# Altium PCB main.PcbDoc
Units mil, origin at the board's own origin, x right, y up, seen from the top; angles counter-clockwise.
Board outline 787.4 x 787.4 mil, 4 copper layers (Top, Ground 1, Signal 1, Bottom), stack 60.591 mil thick; 26 components, 16 nets, 70 pads, 49 vias.
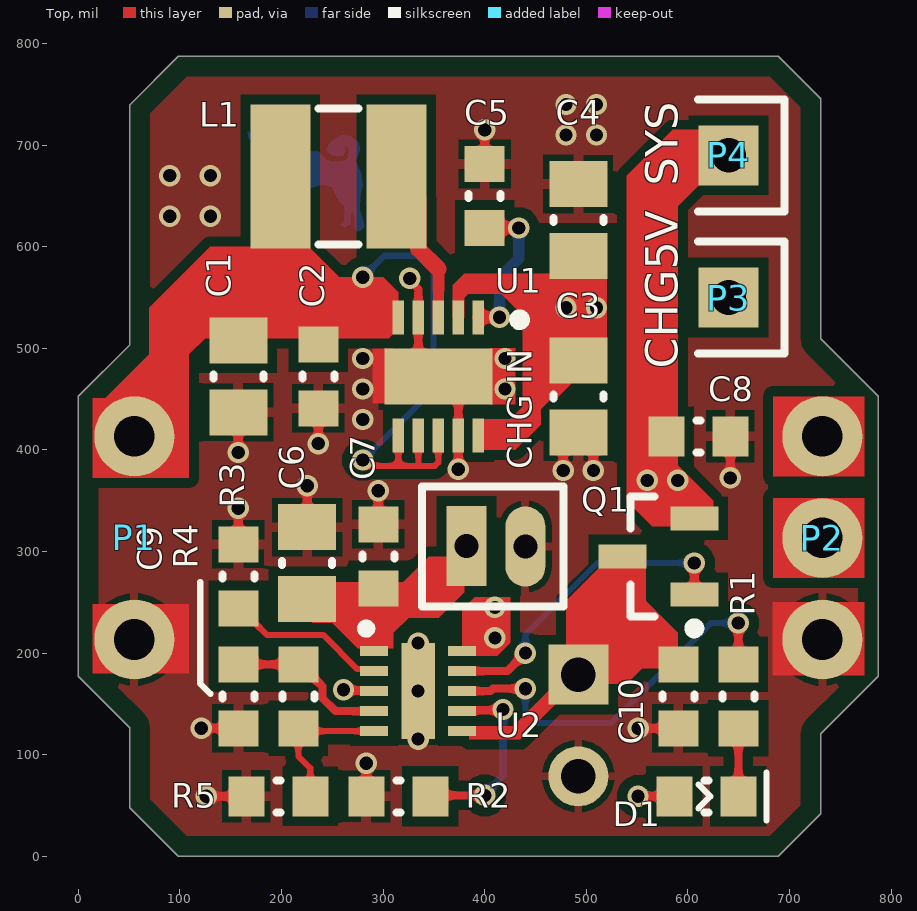
[diagram p0: Top view]
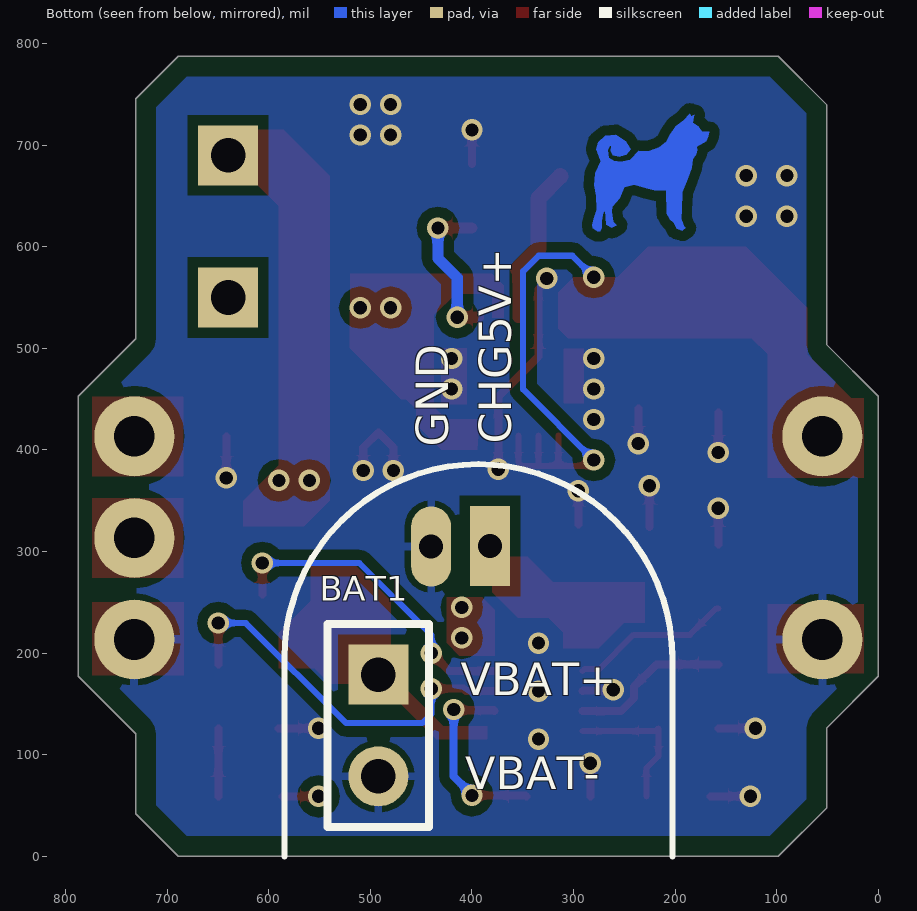
[diagram p1: Bottom view, seen from below]
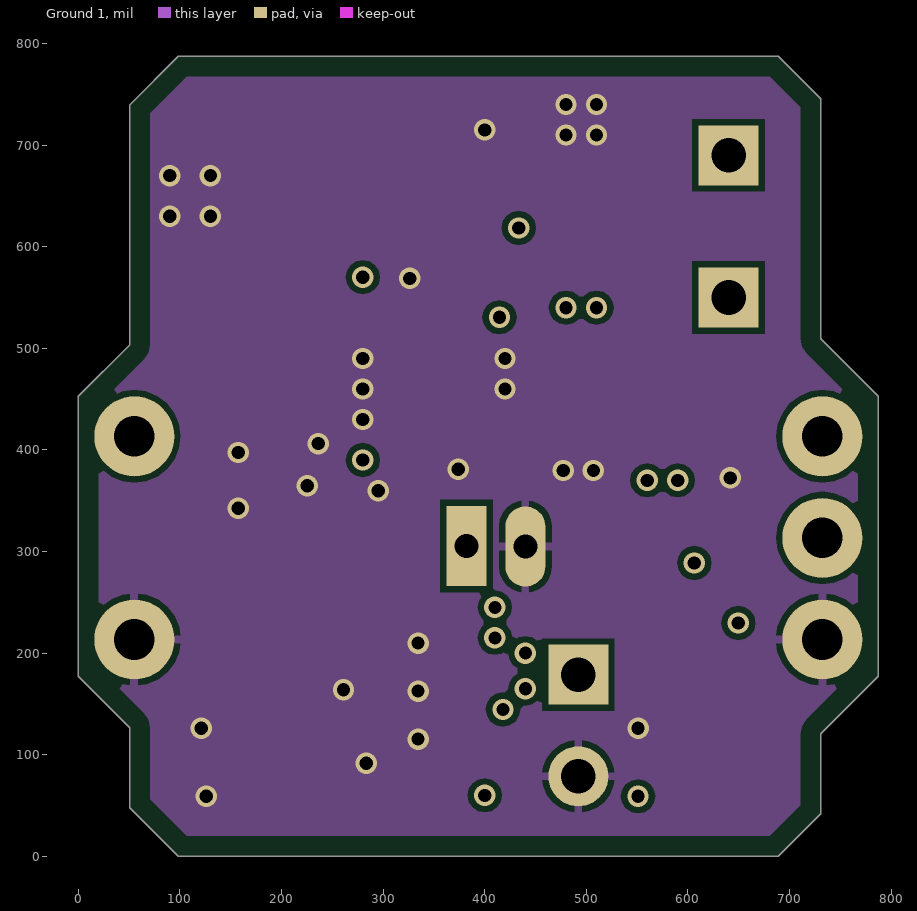
[diagram p2: Ground 1]
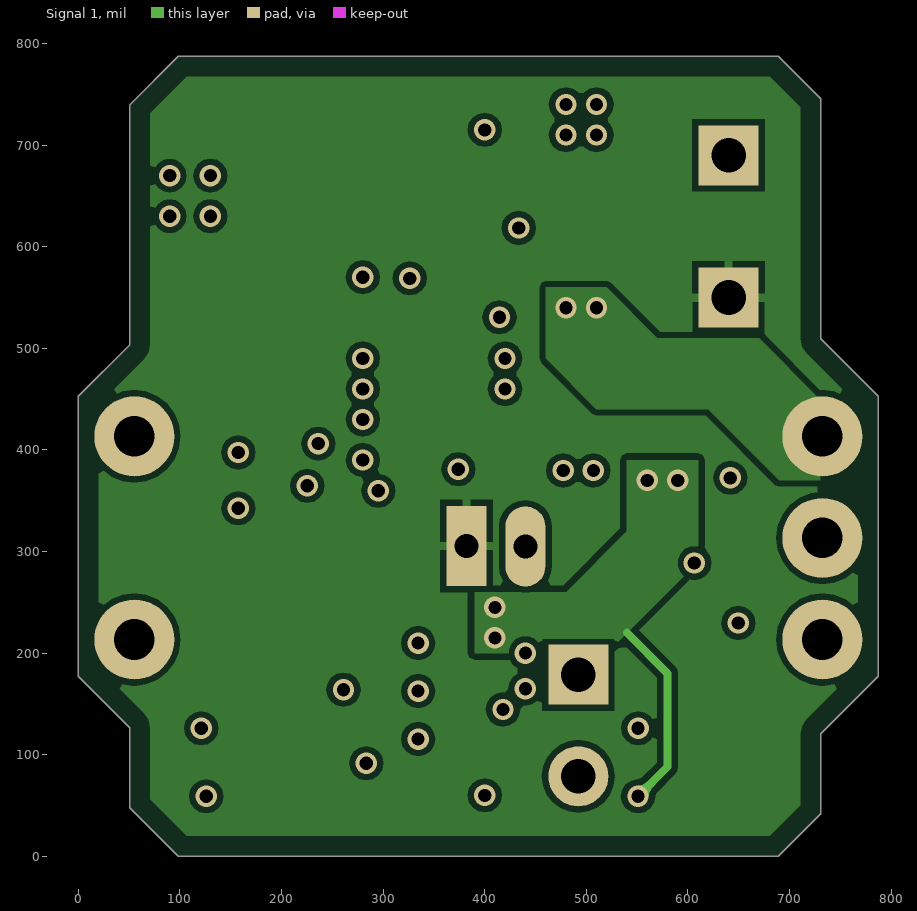
[diagram p3: Signal 1]

## Layer stack, top to bottom
Top Solder: solder mask 0.7874, Solder Resist, Dk 3.5
Top: signal copper 0.7087
Dielectric 1: core 3.937, FR-4, Dk 4.8
Ground 1: signal copper 0.7087
Dielectric 3: prepreg 49.2126, Dk 4.2
Signal 1: signal copper 1.378
Dielectric 5: core 3.937, Dk 4.2
Bottom: signal copper 0.7087
Bottom Solder: solder mask 0.7874, Solder Resist, Dk 3.5

## Board outline
50.64,47.78 50.64,126.52 0,177.17 0,452.76 50.64,503.4 50.64,739.62 98.43,787.4 688.98,787.4 730.79,745.59 730.79,509.37 787.4,452.76 787.4,177.17 730.79,120.55 730.79,41.81 688.98,0 98.43,0

## Design rules (kind name [scope] priority, off if disabled: settings)
BoardOutlineClearance [All] p1: gap=19.68 ignorepadtopadclearanceinfootprint=FALSE
Clearance PolyClearance_Inner [InPolygon And (Not(OnBottom Or OnTop) )] p1: gap=6 ignorepadtopadclearanceinfootprint=FALSE
Clearance PolyClearance_Outer [InPolygon And (OnBottom Or OnTop) and InNet('GND')] p2: gap=10 ignorepadtopadclearanceinfootprint=FALSE
Clearance [All] p3: gap=6 ignorepadtopadclearanceinfootprint=FALSE
ComponentClearance ComponentClearance_1 [HasFootprint('HDR1X5') vs HasFootprint('HDR1X5')] p1: gap=0 collisioncheckmode=3 verticalgap=100000 showdistances=FALSE
ComponentClearance [All] p2: gap=8 collisioncheckmode=3 verticalgap=10 showdistances=FALSE
DiffPairsRouting [All] p1: maxlimit=16 minlimit=5 mostfreqgap=10 toplayer_minwidth=4 toplayer_maxwidth=15 toplayer_prefwidth=10 midlayer1_minwidth=4 midlayer1_maxwidth=15 midlayer1_prefwidth=10 midlayer2_minwidth=4 midlayer2_maxwidth=15 midlayer2_prefwidth=10 bottomlayer_minwidth=4 bottomlayer_maxwidth=15 bottomlayer_prefwidth=10 maxuncoupledlength=500
HoleSize [All] p1: absolutevalues=TRUE maxlimit=200 minlimit=1 maxpercent=80.000 minpercent=20.000
MinimumSolderMaskSliver [All] p1: minsoldermaskwidth=0
MinimumSolderMaskSliver SilkscreenOverComponentPads [All] p2: minsoldermaskwidth=10
PlaneClearance [All] p1: clearance=6
PlaneConnect [All] p1: planeconnectstyle=Relief reliefexpansion=6 reliefentries=4 reliefconductorwidth=6 reliefairgap=6
PolygonConnect PolygonConnect_1 [IsVia vs (OnBottom Or OnTop)] p1: connectstyle=Direct reliefconductorwidth=8 reliefentries=4 polygonreliefangle="90 Angle" airgapwidth=6
PolygonConnect PolygonConnect_Inner [Not (OnTop  Or OnBottom )] p2: connectstyle=Direct reliefconductorwidth=8 reliefentries=4 polygonreliefangle="90 Angle" airgapwidth=2
PolygonConnect PolygonConnect_Outer [(OnTop  Or OnBottom ) and InNet('GND')] p3: connectstyle=Relief reliefconductorwidth=10 reliefentries=4 polygonreliefangle="90 Angle" airgapwidth=6
PolygonConnect [All] p4: connectstyle=Direct reliefconductorwidth=10 reliefentries=4 polygonreliefangle="90 Angle" airgapwidth=10
RoutingVias [All] p1: holewidth=13 width=21 viastyle="Through Hole" minholewidth=4 minwidth=10 maxholewidth=100 maxwidth=300
SilkToSilkClearance [All] p1: silktosilkclearance=6
SilkToSolderMaskClearance [IsPad] p1: minsilkscreentomaskgap=6 clearancetoexposedcopper=TRUE
SolderMaskExpansion SolderMaskExpansion_1 [AsMils(ViaSize) <= 21] p1: expansion=-12 istentingtop=FALSE
SolderMaskExpansion [All] p2: expansion=3 istentingtop=FALSE
Width [All] p1: maxlimit=32 minlimit=3.6 preferedwidth=6 minimp=50.000000 maximp=50.000000 favimp=50.000000
22 further rules are at their usual default settings.

## Components (designator, comment, footprint, x,y, rotation, side; value= is the part's Value field where it differs from the comment)
BAT1 "Header 2" HDR1X2 492.13,178.74 r270 bottom
C1 "10uF" CAPC0805(2012)130_N 157.48,472.44 r270 top
C2 "0.1uF" CAPC0603(1608)100_N 236.22,472.44 r270 top
C3 "10uF" CAPC0805(2012)130_N 492.13,452.76 r270 top
C4 "10uF" CAPC0805(2012)130_N 492.13,626.3 r90 top
C5 "0.1uF" CAPC0603(1608)100_N 400,650 r90 top
C6 "10uF" CAPC0805(2012)130_N 225.32,288.52 r90 top
C7 "0.1uF" CAPC0603(1608)100_N 295.28,295.28 r90 top
C8 "1uF" CAPC0603(1608)100_N 610.24,413.39 r0 top
C9 "0.1uF" CAPC0603(1608)100_N 157.48,157.48 r270 top
C10 "0.1uF" CAPC0603(1608)100_N 590.55,157.48 r270 top
"CHG IN" "MHDR1X2" MHDR1X2 386.35,305.03 r0 top
D1 "RED LED" LED_0603 618.11,59.06 r180 top
L1 "2.2uH NR3015T2R2M" IND_3x3_SMD 255.91,669.29 r0 top
P1 "Header 3" HDR1X3#1 55.12,413.39 r270 top
P2 "Header 3" HDR1X3#2 732.28,213.39 r90 top
P3 "Plug" PIN1 640,550 r0 top
P4 "Plug" PIN1 640,690 r0 top
Q1 "FDN342P" SOT-23 570.87,295.28 r180 top
R1 "1k" RESC0603(1608)_N 649.61,157.48 r90 top
R2 "1k" RESC0603(1608)_N 314.96,59.06 r180 top
R3 "1k" RESC0603(1608)_N 157.48,275.59 r270 top
R4 "27k" RESC0603(1608)_N 216.54,157.48 r90 top
R5 "3.3k" RESC0603(1608)_N 196.85,59.06 r0 top
U1 "TPS61202" DRC10_TI 354.33,472.44 r270 top
U2 "BQ25050DQCR" TI_WSON10 334.45,162.63 r0 top

## Footprints (in the part's own frame and the unit in brackets; to place one, negate y for a bottom-side part, rotate by r counter-clockwise, add the part's x,y. Pads: shape width x height; smd on the part's side, far side on the other; paste and mask are expansions set on the pad)
CAPC0603(1608)100_N [mm] "Chip Capacitor, Body 1.6x0.8mm, Height 1.0mm, IPC Medium Density"
  rect 0.9x1 smd: 1(-0.8,0) 2(0.8,0)
  silkscreen extent -0.05,-0.4 0.05,0.4, body extent -0.87,-0.48 0.88,0.47, height 1
CAPC0805(2012)130_N [mm] "Chip Capacitor, Body 2.0x1.2mm, Height 1.3mm, IPC Medium Density"
  rect 1.15x1.45 smd: 1(-0.9,0) 2(0.9,0)
  silkscreen extent -0.05,-0.62 0.05,0.63, body extent -1.1,-0.72 1.1,0.73, height 1.3
DRC10_TI [mm]
  rect 0.85x0.28 smd paste-0.14: 1(-1.475,1) 2(-1.475,0.5) 3(-1.475,0) 4(-1.475,-0.5) 5(-1.475,-1) 6(1.475,-1) 7(1.475,-0.5) 8(1.475,0) 9(1.475,0.5) 10(1.475,1)
  rect 1.4x2.7 smd paste-0.14: 11(0,0)
  silkscreen extent -1.53,1.92 -1.31,2.14, body extent -1.5,-1.5 1.5,1.5, height 0.7
HDR1X2 [mm] "Connector; Header; 2 Position"
  rect 1.5x1.5 hole 0.864: 1(0,0)
  round 1.5 hole 0.864: 2(2.54,0)
  silkscreen extent -1.27,-1.27 3.81,1.27
HDR1X3#1 [mm] "Connector; Header; 3 Position"
  round 2 hole 1.016: 1(0,0) 3(5.08,0)
HDR1X3#2 [mm] "Connector; Header; 3 Position"
  round 2 hole 1.016: 1(0,0) 2(2.54,0) 3(5.08,0)
IND_3x3_SMD [mm] "Power Inductor SMD 3x3mm"
  rect 1.5x3.6 smd: 1(-1.45,0) 2(1.45,0)
  silkscreen extent -0.5,-1.7 0.5,1.7, body extent -1.5,-1.5 1.5,1.5, height 2
LED_0603 [mm] "LED DIODE 0603"
  rect 0.9x1 smd: 1(-0.8,0) 2(0.8,0)
  silkscreen extent -1.5,-0.6 0.2,0.6, body extent -0.85,-0.47 0.85,0.47, height 0.6
MHDR1X2 [mm] "Connector; Header; 2 Position"
  rect 1x2 hole 0.6: 1(-0.108,0.009)
  oval 1x2 hole 0.6: 2(1.364,-0.002)
  silkscreen extent -1.23,-1.5 2.32,1.5
PIN1 [mm] "Connector; Plug"
  rect 1.5x1.5 hole 0.864: 1(0,0)
  silkscreen extent -0.76,-1.4 1.4,1.4
RESC0603(1608)_N [mm] "Chip Resistor, Body 1.6x0.8mm, IPC Medium Density"
  rect 0.9x1 smd: 1(-0.8,0) 2(0.8,0)
  silkscreen extent -0.05,-0.4 0.05,0.4, body extent -0.85,-0.47 0.85,0.47, height 0.6
SOT-23 [mm]
  rect 1.2x0.6 smd: 1(-0.9,0.95) 2(-0.9,-0.95) 3(0.9,0)
  silkscreen extent -1.02,-1.5 0.7,1.92, body extent -0.7,-1.52 0.7,1.52, height 1.12
TI_WSON10 [mm]
  rect 0.7x0.25 smd paste+0: 1(-1.1,1) 2(-1.1,0.5) 3(-1.1,0) 4(-1.1,-0.5) 5(-1.1,-1) 6(1.1,-1) 7(1.1,-0.5) 8(1.1,0) 9(1.1,0.5) 10(1.1,1)
  rect 0.84x2.4 smd paste-0.1: 11(0,0)
  silkscreen extent -1.4,1.46 -1.2,1.66, body extent -1,-1.5 1,1.5, height 0.7

## Part data
BAT1 "CHG IN": "Header, 2-Pin", LatestRevisionDate=17-Jul-2002, LatestRevisionNote="Re-released for DXP Platform.", Publisher="Altium Limited"
C1 C2 C3 C4 C5 C6 C7 C8 C9 C10: library part CAP, "Capacitor Ceramic"
D1: library part LED, "LED OPTO"
L1: library part IND_PWR, "Power Inductor SMD"
P1 P2: "Header, 3-Pin", LatestRevisionDate=17-Jul-2002, LatestRevisionNote="Re-released for DXP Platform.", Publisher="Altium Limited"
Q1: library part "TRANSISTOR PCH FET", "P CHANNEL FET", Current - Continuous Drain (Id) @ 25° C=115mA, Drain to Source Voltage (Vdss)=60V, Input Capacitance (Ciss) @ Vds="50pF @ 25V", Manufacturer="Fairchild Semiconductor", Manufacturer Part Number=2N7002, Package / Case="SOT-23-3, TO-236-3, Micro3™, SSD3, SST3", Power - Max=200mW, Supplier Part Number=2N7002NTR-ND, Category="Discrete Semiconductor Products", FET Feature="Logic Level Gate", FET Type="MOSFET N-Channel, Metal Oxide", Gate Charge (Qg) @ Vgs=-, Mounting Type="Surface Mount", Packaging="Tape & Reel (TR)", Rds On (Max) @ Id, Vgs="7.5 Ohm @ 500mA, 10V", Reel=Q2, RoHS="RoHS Compliant", Supplier=Digi-Key, Supplier 1=Digi-Key, Supplier Part Number 1=2N7002NTR-ND, Vgs(th) (Max) @ Id="2.5V @ 250µA"
R1 R2 R3 R4 R5: library part RES, "Resistor SMD"
U1: library part TPS61200, "Buck-Boost Regulator"
U2: library part bq25050, "IC BATT CHG LI-ION 1CELL 10WSON"
P3 P4: LatestRevisionDate=17-Jul-2002, LatestRevisionNote="Re-released for DXP Platform.", Publisher="Altium Limited"

## Via types
v1: diameter 21, hole 13, Top to Bottom, tented both sides, 49 vias

## Nets (pads, with @x,y where several pads share a name; then routed paths per layer and width w, separated by ;. In a path a pad name is that pad's centre, name@x,y a point inside that pad or via, vN(x,y) a via of type N, cw(c..) or ccw(c..) an arc to the next point about the centre after c; other vN are vias at no path point)
+5V: "CHG IN.1" C6.1 C7.1 P3.1 U2.1
BAT: BAT1.1 C10.1 Q1.3 U2.6
GBVCC: C1.1 C2.1 L1.1 P1.1 U1.5 U1.6 U1.7 U1.8 | length 463.8
  Top w6: v1(280,390) 285.67,384.33 314.96,384.33 ; U1.6 314.96,384.33 ; 334.65,384.65 U1.7 ; U1.8 354.33,387.85 350.82,384.33 314.96,384.33
  Bottom w6: v1(280,390) 349.62,459.62 349.62,575.84 334.3,591.15 301.15,591.15 v1(280,570)
GBVDD: C3.1 C4.1 P2.3 U1.2 U1.10
  other v1: 480,540 510,540
GBVEE: P2.2
GND: "CHG IN.2" BAT1.2 C1.2 C2.2 C3.2 C4.2 C5.2 C6.2 C7.2 C8.2 C9.2 C10.2 P1.3 P2.1 R2.2 R3.1 R5.1 U1.4 U1.9 U1.11 U2.3 U2.11 | length 759.2
  Top w8: v1(120.98,125.98) C9.2 ; v1(125.94,59.06) R5.1 ; R3.1 v1(157.48,342.52) ; v1(157.48,397.48) C1.2 ; C6.2 v1(225.32,364.68) ; v1(236.22,406.22) C2.2 ; v1(261,164) 261.68,163.31 290.46,163.31 U2.3 ; R2.2 v1(283.46,91.54) ; C7.2 v1(295.28,359.72) ; v1(326.25,568.85) 326.25,566.55 334.65,558.16 ; U1.4 334.65,558.16 ; v1(374.02,380.98) U1.9 374.02,452.76 U1.11 334.65,492.13 334.65,558.16 ; C5.2 v1(400,715) ; v1(477.31,379.72) 477.31,402.51 C3.2 506.94,402.51 v1(506.94,379.72) ; v1(550.98,125.98) C10.2 ; v1(641.73,372.46) C8.2
  other v1: 334.45,115.39 334.45,162.63 334.45,209.88 280,430 280,460 420,460 280,490 420,490 90,630 130,630 90,670 130,670 480,710 510,710 480,740 510,740
NetC5_1: C5.1 U1.1 | length 150.2
  Top w11: U1.1 v1(414.49,530.51) ; C5.1 v1(433.5,618.5)
  Bottom w11: v1(414.49,530.51) 414.49,569.49 433.5,588.5 v1(433.5,618.5)
NetC9_1: C9.1 R4.2 U2.4 | length 159.5
  Top w8: C9.1 218.5,188.98 240.38,167.1 240.38,155.62 253.05,142.95 U2.4
NetD1_1: D1.1 R1.1 | length 66.9
  Top w8: D1.1 R1.1
NetL1_2: L1.2 U1.3 | length 156
  Top w11: U1.3 354.34,544.99 354.49,545.13 354.49,578.08
  Top w16: L1.2 334.52,647.76 334.52,598.04 354.49,578.08
NetQ1_1: Q1.1 U2.9 | length 313.9
  Top w8: U2.9 422.32,182.32 v1(440,200) ; Q1.1 v1(606.3,288.7)
  Bottom w6: v1(440,200) 440,217.88 510.82,288.7 v1(606.3,288.7)
NetR1_2: R1.2 U2.8 | length 383
  Top w8: U2.8 405.78,162.63 408.2,165.05 439.95,165.05 v1(440,165) ; R1.2 v1(649.61,229.61)
  Bottom w6: v1(440,165) 440,140 448.93,131.07 523.9,131.07 622.44,229.61 v1(649.61,229.61)
NetR2_1: R2.1 U2.7 | length 186.8
  Top w8: R2.1 347.4,60 v1(400,60) ; U2.7 378.56,143.75 417.15,143.75 v1(417.95,144.55)
  Bottom w8: v1(400,60) 400,60.9 417.95,78.85 v1(417.95,144.55)
NetR3_2: R3.2 U2.2 | length 159.3
  Top w6: R3.2 159.45,244.09 185.54,218 241,218 274.76,184.24 289.22,184.24 U2.2
NetR4_1: R4.1 R5.2 U2.5 | length 147.6
  Top w6: R5.2 228.35,86.65 216.54,98.47 216.54,123.26 R4.1 219.26,123.26 U2.5
SYS: C8.1 D1.2 P4.1 Q1.2 U2.10 | length 225.2
  Top w8: v1(550.94,59.06) D1.2
  Signal 1 w8: 540,220 580,180 580,88.11 v1(550.94,59.06)
  other v1: 410,215 410,245 560,370 590,370

## Polygon pours and split planes (outlines as drawn)
+5V on Signal 1 "5V INNER" (solid, remove dead copper, pour order 47): 0,0 0,787.4 787.4,787.4 787.4,0
GBVDD on Signal 1 "5vusb  inner" (solid, pour order 46): 730,450 730,370 690,370 620,440 510,440 460,490 460,560 520,560 570,510 670,510
SYS on Signal 1 "5vusb  inner" (solid, pour order 45): 390,260 480,260 540,320 540,390 610,390 610,290 520,200 390,200
GND on Ground 1 "gnd inner" (solid, remove dead copper, pour order 42): 0,0 0,787.4 787.4,787.4 787.4,0
GND on Bottom "gnd bottom" (solid, remove dead copper, pour order 44): 0,0 0,787.4 787.4,787.4 787.4,0
GND on Top "gnd top" (solid, pour order 43): 0,787.4 787.4,787.4 787.4,0 0,0

## Other copper
Top:
  rectangle net GBVDD: 683.94,374.02 773.94,452.76
  rectangle net GND: 289.67,445.71 310,500
  region net GBVCC: 108.94,451.18 13.94,451.18 13.94,372.44 108.94,372.44
  region net GND: 108.94,248.39 13.94,248.39 13.94,179.7 108.94,179.7
  rectangle net GND: 683.23,177.81 773.94,250.33
  rectangle net GBVEE: 683.94,274.02 773.94,352.76
  region net SYS: 615,715 585,715 540,670 540,350 565,325 625,325 625,350 590,385 590,640 615,665
  region net SYS: 390,255 377.76,242.76 377.76,197.25 412.25,197.25 425,210 425,255
  region net BAT: 385,128.05 428.05,128.05 469.54,169.54 469.54,149.54 435,115 385,115
  region net BAT: 518.52,290 558.42,290 558.42,251.58 590,220 590,185 555,185 540,170 480,170 480,251.48
  region net GBVDD: 393.7,414.37 395,430 425,430 437.58,442.58 437.58,532.42 416.07,553.93 383.93,553.93 380,550 380,530 368.76,530 368.76,561.99 379.92,573.15 520,573.15 520,500 470,450 465,450 455,440 455,425 430,400 395,400
  region net GBVCC: 305.69,510 314.96,519.27 314.96,555 300.08,570 256.77,570 226.77,600 130,600 70,540 70,494.35 26.68,451.03 26.68,445 108.94,445 108.94,493.94 125,510 260,510
  region net GND: 405,500 430,500 430,445 405,445
  region net +5V: 230,230 250,230 275,205 310,205 310,220 325,235 355,235 380,260 380,295 345,295 320,270 230,270
Bottom:
  region: 279.8,660.61 278.7,672.39 273.17,684.35 277.41,695.76 275.75,702.94 268.57,709.01 258.63,710.12 248.7,704.04 243.45,695.76 248.14,690.42 254.95,688.58 261.39,689.87 263.42,694.66 262.68,699.26 263.42,699.61 264.51,699.61 266.36,694.84 265.45,687.67 260.61,684.39 253.61,683.39 244.39,685.61 235.61,694.39 226.43,694.1 215.57,697.78 208.57,703.31 204.89,710.67 199.37,718.77 191.46,724.29 185.38,731.1 184.28,728.34 180.97,729.81 182.44,722.08 177.1,718.58 173.97,713.43 166.61,713.06 167.16,708.64 169.19,704.04 178.57,698.52 178.21,694.84 179.31,690.97 182.81,686.01 183.73,677.72 187.59,666.86 192.93,653.8 193.67,636.31 193.85,627.66 191,619.75 189.62,618.46 192.93,615.88 198.64,617.72 201.21,623.43 204.71,626.74 208.02,632.26 208.57,655.82 220.54,655.64 228.45,657.66 240.23,660.98 249.98,658.58 254.4,647.54 261.76,639.26 262.32,634.29 261.03,624.72 257.35,621.22 262.32,618.46 267.61,621.39 268.57,635.43 270.61,633.39 271.99,625.78 271.99,618.46 273.61,615.43 276.49,615.33 280.9,618.09 281.46,621.77 280.17,627.3 277.04,636.31 277.41,649.93

## Silkscreen, mask and mechanical layers (free items; w line width, h text height)
Top Overlay:
  lines w6: 120,270 120,170 130,160
  text "SYS" at 590,660 h32 r90
  text "CHG5V" at 590,480 h32 r90
Bottom Overlay:
  lines w5.98: 202.76,195 cw(c393.7,195) 584.65,195
  lines w6: 202.76,0 202.76,195 ; 584.65,0 584.65,195
  text "CHG5V+" at 361.33,406.02 h32 r270
  text "GND" at 423.35,403.27 h32 r270
  text "VBAT+" at 411.22,158.54 h32
  text "VBAT-" at 406.39,66.06 h32
Bottom Solder:
  text "080721" at 316.27,504.48 h40
  text "IR0" at 250,240 h40 r270
  text "GBPP-001" at 145,40 h40 r270
Mechanical 1:
  the board outline again, w10
Mechanical 3:
  circle w0.25: c-1984,6378.91 r0.12